# EAGLE board logic (EAGLE 9.2.2)
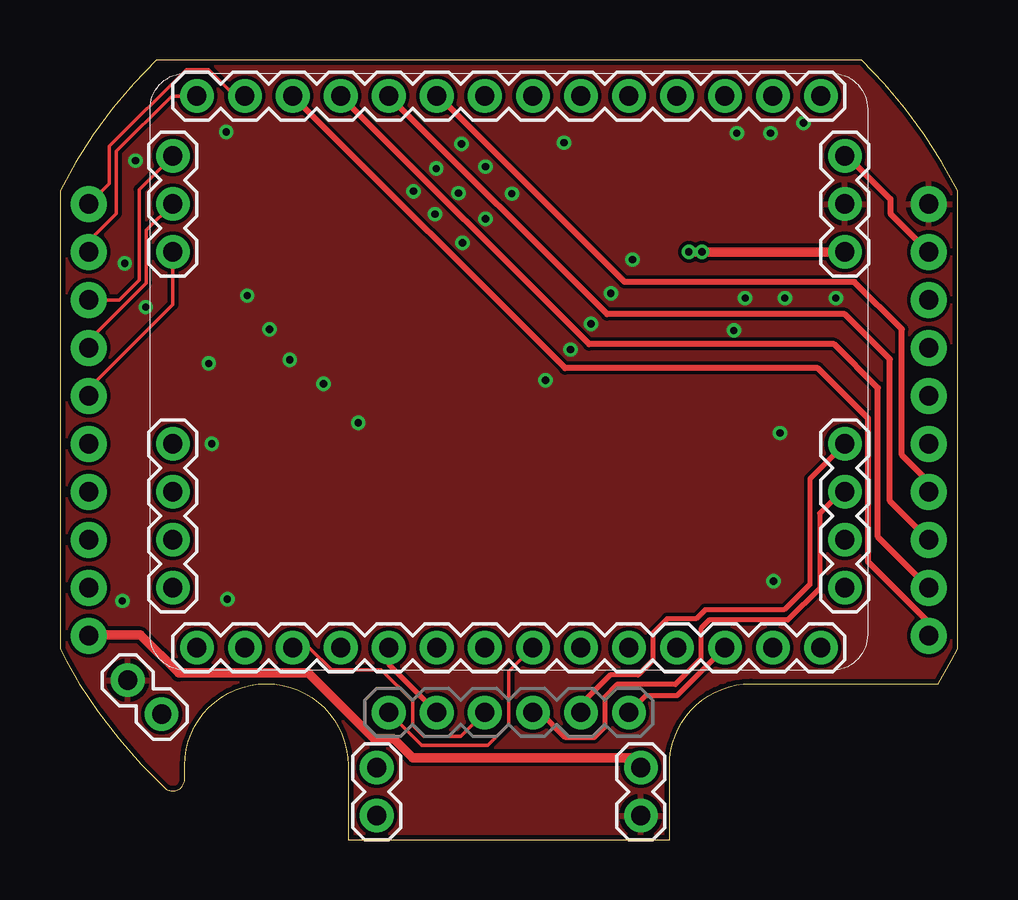
[diagram p0: board, top side]
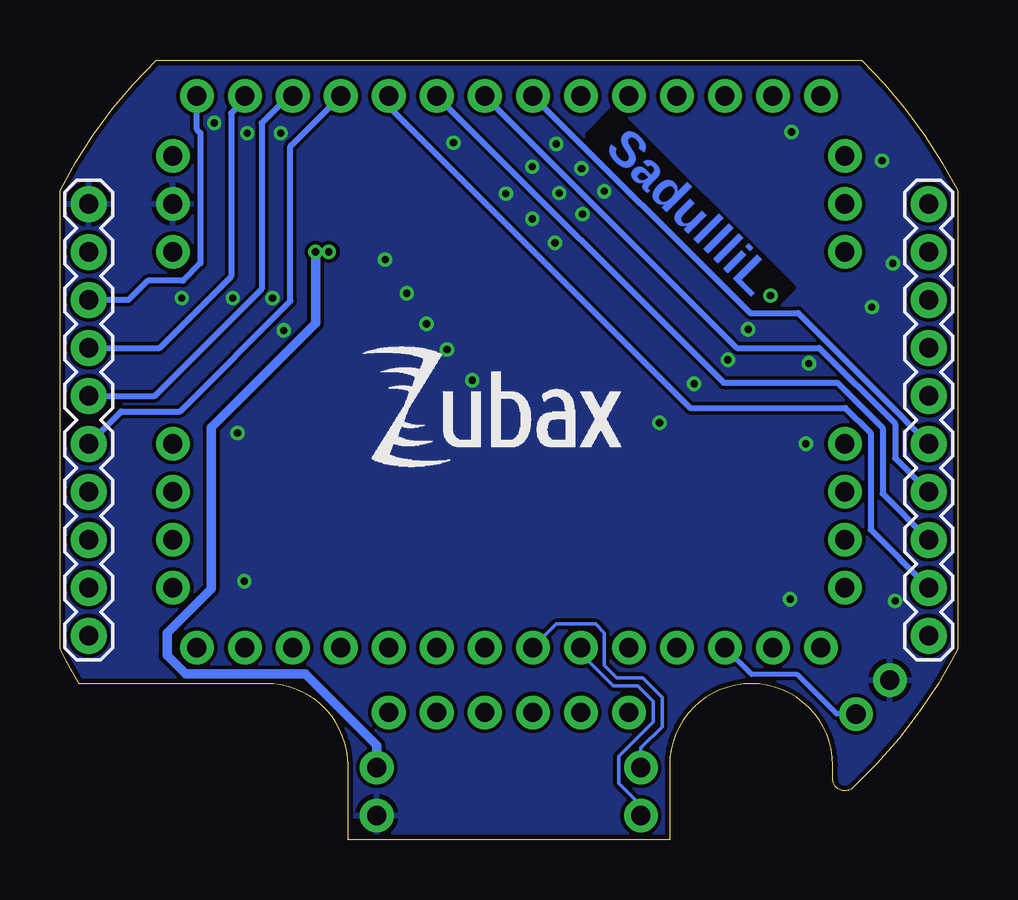
[diagram p1: board, bottom side, seen from below]

Size 37.4 x 32.5 mm. Coordinates in mm from the lower left corner, seen from the top.
Outline: 28.8,6.5 36.59,6.5 arc5 37.4,7.94 37.4,27.06 arc19 33.4,32.5 4,32.5 arc19 0,27.06 0,7.94 arc5 0.81,6.5 arc15 4.36,2.16 arc133 5.2,2.53 5.2,3.1 arc-180 12,3.1 12,0 25.4,0 25.4,3.1 arc-90 28.8,6.5
Copper layers (1*16): Top 0.035mm / dielectric 0.5mm / Bottom 0.035mm
Design rules "myxa *": minimum track width 0.15mm, minimum drill 0.2mm, track to track 0.15mm, track to pad 0.15mm, pad to pad 0.15mm, via to via 0.15mm, smd to smd 0.15mm, copper to edge 0.2mm, drill to drill 0.2mm, minimum pad ring 0.125mm, minimum via ring 0.125mm, stop-mask expansion 1mil, vias tented up to drill 0.31mm, thermal gap 8mil
Net classes: 1 HV: clearance 0.25 mm to class 0, clearance 0.25 mm

## Footprints (pad centres in the part's own frame; a part is rotated, then mirrored left to right if it is on the bottom)
1X10-PTH_2 = drill 0.8 pad 1.5: 1 -9,0; 2 -7,0; 3 -5,0; 4 -3,0; 5 -1,0; 6 1,0; 7 3,0; 8 5,0; 9 7,0; 10 9,0
1X06-PTH-2 = drill 0.8 pad 1.4: 1 -5,0; 2 -3,0; 3 -1,0; 4 1,0; 5 3,0; 6 5,0
1X02-PTH-2 = drill 0.8 pad 1.4: 1 -1,0; 2 1,0
MITOHONDRIQUE = drill 0.8 pad 1.4: 1 -5,14; 2 -7,14; 3 -9,14; 4 -11.5,13; 5 -11.5,11; 6 -11.5,9; 7 -11.5,7; 8 -11.5,5; 9 -11.5,3; 10 -11.5,1; 11 -11.5,-1; 12 -11.5,-3; 13 -11.5,-5; 14 -11.5,-7; 15 -11.5,-9; 16 -11.5,-11; 17 -11.5,-13; 18 -9,-14; 19 -7,-14; 20 -5,-14; 21 3,-14; 22 5,-14; 23 7,-14; 24 9,-14; 25 11.5,-13; 26 11.5,-11; 27 11.5,-9; 28 11.5,-7; 29 11.5,-5; 30 11.5,-3; 31 11.5,-1; 32 11.5,1; 33 11.5,3; 34 11.5,5; 35 11.5,7; 36 11.5,9; 37 11.5,11; 38 11.5,13; 39 9,14; 40 7,14; 41 5,14; 42 3,14

## Placement (x,y rotation side)
CON1  PINHEAD_1X10-2  [1X10-PTH_2]  36.2,17.5 90 bottom
CON2  PINHEAD_1X10-2  [1X10-PTH_2]  1.2,17.5 270 bottom
CON3  PINHEAD_1X06-2  [1X06-PTH-2]  18.7,5.3 0 top
CON4  PINHEAD_1X02-2  [1X02-PTH-2]  13.2,2 90 top
CON5  PINHEAD_1X02-2  [1X02-PTH-2]  24.2,2 270 top
CON6  PINHEAD_1X02-2  [1X02-PTH-2]  3.53,5.94 135 top
MODULE2  MITOHONDRIQUE-TH  [MITOHONDRIQUE]  18.7,19.5 270 top
U$1  [ZUBAX_LOGO_5X10]  24.88,15.35 0 bottom

## Library data of the parts
CON1-CON6 = pinhead
MODULE2 = zubax_modules; MANF: Zubax Robotics; MANF#: Mitochondrik
U$1 = pixhawk_esc_1.5_master_lib

## Nets
ADJ: CON3.2 MODULE2.29
BLUE: CON3.1 MODULE2.32
CAN1_LED: CON3.6 MODULE2.36
CAN1_RX: CON3.4 MODULE2.41
CAN1_TX: CON3.5 MODULE2.42
GND: CON1.10 CON5.2 CON6.2 MODULE2.2
GPIO1: CON3.3 CON6.1 MODULE2.27
GPIO2: MODULE2.28
GREEN: CON4.2 MODULE2.31
N$1: CON2.3 MODULE2.18
N$2: CON2.2 MODULE2.17
N$3: CON2.1 MODULE2.16
N$4: CON2.4 MODULE2.19
N$5: CON1.1 MODULE2.15
PHASE_A [HV]: CON1.7 MODULE2.5
PHASE_A_GATE_HIGH [HV]: CON1.8 MODULE2.4
PHASE_A_GATE_LOW: CON1.6 MODULE2.6
PHASE_A_GND: CON1.5 MODULE2.7
PHASE_B [HV]: CON1.3 MODULE2.13
PHASE_B_GATE_HIGH [HV]: CON1.4 MODULE2.12
PHASE_B_GATE_LOW: CON1.2 MODULE2.14
PHASE_C [HV]: CON2.8 MODULE2.9
PHASE_C_GATE_HIGH [HV]: CON2.9 MODULE2.8
PHASE_C_GATE_LOW: CON2.7 MODULE2.10
PHASE_C_GND: CON2.6 MODULE2.11
RED: CON4.1 MODULE2.30
TEMPERATURE_SENSOR: CON2.5 MODULE2.20
VDC [HV]: CON1.9 MODULE2.3
VDD_5V: CON2.10 CON5.1 MODULE2.1

## Tracks (layer width: path | path; a pad name or v marks a point on that pad's centre or on a via)
ADJ
  Top 0.2: MODULE2.29 13.7,7.3 CON3.2
BLUE
  Top 0.15: MODULE2.32 18.71,7.01 18.71,4.8 17.83,3.93 15.07,3.93 CON3.1
CAN1_LED
  Top 0.2: MODULE2.36 25.7,6 24.4,6 CON3.6
CAN1_RX
  Top 0.2: MODULE2.41 32.55,14.5 31.65,13.6 31.65,10.47 30.32,9.15 27.05,9.15 26.7,8.8 26.7,7.53 25.64,6.46 23.21,6.46 22.7,5.96 22.7,4.7 22.25,4.24 21.06,4.24 20,5.3 CON3.4
CAN1_TX
  Top 0.2: MODULE2.42 31.25,15.05 31.25,10.65 30.17,9.57 26.88,9.57 26.5,9.2 25.3,9.2 24.7,8.6 24.7,7.47 24.09,6.86 22.92,6.86 21.7,5.64 CON3.5
GND  (via drill 0.3 pad 0.6)
  other vias: 21,29.05 22.95,22.77 18.82,26.93 17.72,25.88 16.77,24.88 10.97,19 9.57,20 15.62,26.07 16.6,26.95 17.72,28.05 16.72,29 15.67,27.98 14.72,27.02 8.72,21.27 6.2,19.85 12.42,17.38 6.97,10.03 29.73,10.78 30,16.95 28.55,22.57 28.07,21.23 30.2,22.57 32.33,22.57 29.6,29.45 28.2,29.45 30.98,29.88 22.12,21.5 21.27,20.43 20.22,19.15 23.85,24.18 7.8,22.68 3.57,22.2 2.7,24.02 3.15,28.3 6.92,29.5 6.32,16.5 2.6,9.95
  pour Bottom: 39.7,38.5 -2.3,38.5 -2.3,0.01 39.7,0.01
  pour Top: -2.3,38.5 39.7,38.5 39.7,0 -2.3,0
GPIO1
  Top 0.15: MODULE2.27 10.39,8 11.32,7.07 13.39,7.07 14.69,5.78 14.69,4.76 15.15,4.3 16.7,4.3 CON3.3
  Bottom 0.2: CON6.1 5.04,5.23 6.69,6.88 8.58,6.88 MODULE2.27
GREEN
  Bottom 0.15: CON4.2 13.2,3.81 12.31,4.7 12.31,5.92 13.13,6.74 14.2,6.74 14.72,7.26 14.72,8.62 15.08,8.98 16.72,8.98 MODULE2.31
N$1
  Top 0.15: MODULE2.18 3.3,27.1 3.3,23.32 2.48,22.5 CON2.3
N$2
  Top 0.15: MODULE2.17 4.65,31 2.35,28.7 2.35,26.1 1.2,24.95 CON2.2
N$3
  Top 0.15: MODULE2.16 7.3,31 6.2,32.1 5.25,32.1 2.05,28.9 2.05,27.35 CON2.1
N$4
  Top 0.15: CON2.4 1.2,20.8 3.6,23.2 3.6,25.4 MODULE2.19
N$5
  Top 0.25: CON1.1 36.2,9.05 33.67,11.57 33.67,17.55 31.58,19.65 21.05,19.65 MODULE2.15
PHASE_A
  Bottom 0.25: CON1.7 33.25,20.5 30.27,23.48 30.27,30.27 29.7,30.85 MODULE2.5
PHASE_A_GATE_HIGH
  Bottom 0.25: CON1.8 34.55,22.5 33.75,23.3 32.27,23.3 31.55,24.02 31.55,29.45 31.7,29.6 MODULE2.4
PHASE_A_GATE_LOW
  Bottom 0.25: CON1.6 33.45,18.5 29,22.95 29,29.88 27.88,31 MODULE2.6
PHASE_A_GND
  Bottom 0.25: MODULE2.7 27.65,29.05 27.8,28.9 27.8,22.45 32.4,17.85 34.85,17.85 CON1.5
PHASE_B
  Top 0.25: CON1.3 34.58,14.12 34.58,20.02 32.7,21.9 22.8,21.9 MODULE2.13
PHASE_B_GATE_HIGH
  Top 0.25: CON1.4 36.2,14.91 35.08,16.03 35.08,21.27 33.1,23.25 23.52,23.25 15.77,31 MODULE2.12
PHASE_B_GATE_LOW
  Top 0.25: CON1.2 34.08,12.62 34.08,18.82 32.25,20.65 22.05,20.65 MODULE2.14
PHASE_C
  Bottom 0.25: MODULE2.9 9.75,19.05 5.02,19.05 3.12,17.15 3.12,14.43 CON2.8
PHASE_C_GATE_HIGH
  Bottom 0.25: MODULE2.8 23.7,30.55 11.15,18 4.68,18 3.62,16.95 3.62,12.93 CON2.9
PHASE_C_GATE_LOW
  Bottom 0.25: MODULE2.10 9.2,20.5 5.76,20.5 2.6,17.34 2.6,15.9 CON2.7
PHASE_C_GND
  Bottom 0.25: MODULE2.11 8.65,21.95 6.65,21.95 2.2,17.5 | 2.2,17.5 | 2.2,17.5 CON2.6
RED
  Bottom 0.15: CON4.1 13.2,1.42 14.12,2.35 14.12,3.38 14.12,3.47 12.68,4.91 12.68,5.76 13.33,6.41 14.35,6.41 15.7,7.76 MODULE2.30
TEMPERATURE_SENSOR
  Top 0.15: MODULE2.20 4.7,22.3 1.2,18.8 CON2.5
VDC
  Top 0.25: MODULE2.3 32.8,28.5 34.6,26.7 34.6,26.1 CON1.9
VDD_5V  (via drill 0.3 pad 0.6)
  Top 0.4: MODULE2.1 v26.75,24.5 v26.2,24.5 | CON5.1 23.79,3.41 14.69,3.41 13.91,4.19 13.09,4.19 10.34,6.94 4.94,6.94 3.35,8.53 1.23,8.53 CON2.10
  Bottom 0.4: v26.75,24.5 26.75,21.52 31.1,17.18 31.1,10.45 32.93,8.62 32.93,7.67 32.16,6.9 27.18,6.9 24.2,3.92 CON5.1

## Text on the board
Bottom: SadullliL
Reference: PHASE_A_SHUNT_P | PHASE_A_SHUNT_N | PHASE_C_GND | PHASE_C_GATE_LOW | PHASE_C | PHASE_C_GATE_HIGH | PHASE_B_GND | PHASE_B_GATE_LOW | PHASE_B | PHASE_B_GATE_HIGH | PHASE_A_GND | PHASE_A_GATE_LOW | PHASE_A | PHASE_A_GATE_HIGH | PHASE_B_SHUNT_N | VDC | PHASE_B_SHUNT_P | GND | TEMPERATURE | 5V